# EAGLE board EndStop (EAGLE 7.2.0)
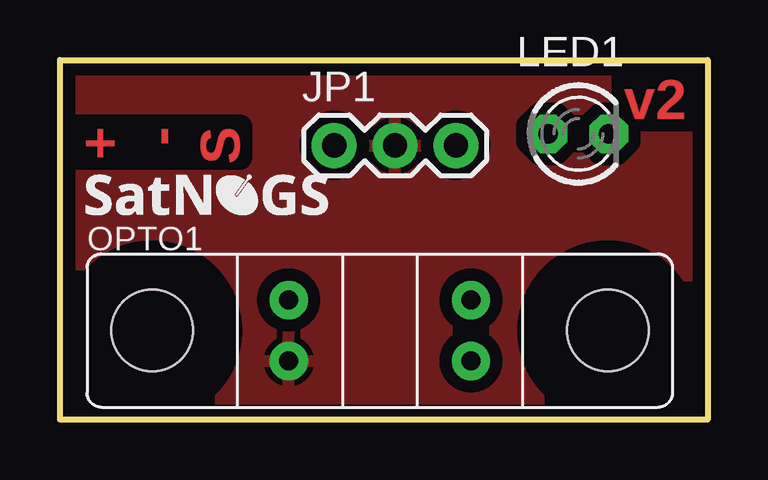
[diagram p0: board, top side]
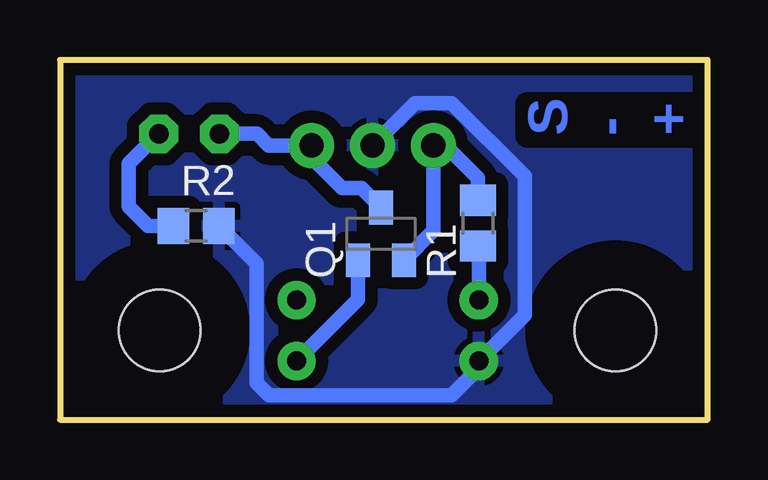
[diagram p1: board, bottom side, seen from below]

Size 27 x 15 mm. Coordinates in mm from the lower left corner, seen from the top.
Outline: 0,0 0,15 27,15 27,0 0,0
Copper layers (1*16): Top 0.035mm / dielectric 1.5mm / Bottom 0.035mm
Design rules "SeeedStudio_2layer_DRU_no_angle_20140221 *": minimum track width 16mil, minimum drill 0.8mm, track to track 6mil, track to pad 6mil, pad to pad 6mil, via to via 6mil, smd to smd 0mil, copper to edge 10mil, drill to drill 10mil, minimum pad ring 0.4mm, minimum via ring 0.4mm, stop-mask expansion 2mil, vias tented up to drill 100mil, thermal gap 10mil
Net classes: 0 default: width 0.508 mm, drill 0.813 mm, clearance 0.254 mm

## Footprints (pad centres in the part's own frame; a part is rotated, then mirrored left to right if it is on the bottom)
1X03 = drill 1.016 pad 1.88: 1 0,0; 2 2.54,0; 3 5.08,0
LED3MM = drill 0.813 octagon: A -1.27,0; K 1.27,0
TCST2013 = drill 0.8: LED_A -3.8,1.27; LED_K -3.8,-1.27; NPN_C 3.8,-1.27; NPN_E 3.8,1.27 | hole 3.4: -9.5,0; 9.5,0
SOT23-BEC = smd 1 x 1.4: B -0.95,-1.1; C 0,1.1; E 0.95,-1.1
R0805 = smd 1.3 x 1.5: 1 -0.95,0; 2 0.95,0

## Placement (x,y rotation side)
JP1  [1X03]  11.43,11.43 0 top
LED1  [LED3MM]  21.61,11.92 0 top
LOGO1  SATNOGS_LOGOSILK_XS  [LOGO_SILK_XS]  1.08,8.53 0 top
OPTO1  TCST2103  [TCST2013]  13.34,3.71 0 top
Q1  BC857ALT1SMD  [SOT23-BEC]  13.62,7.75 0 bottom
R1  180  [R0805]  9.57,8.19 90 bottom
R2  180  [R0805]  21.32,8.08 0 bottom

## Library data of the parts
JP1 = SparkFun-Connectors
LED1 = led
LOGO1 OPTO1 = satnogs
Q1 = transistor-pnp
R1 R2 = rcl

## Nets
GND: JP1.2 OPTO1.LED_K R2.2
N$2: OPTO1.LED_A R1.1
N$3: LED1.K R2.1
N$4: OPTO1.NPN_C Q1.B
SIGNAL: JP1.3 LED1.A Q1.C
VCC: JP1.1 Q1.E R1.2

## Tracks (layer width: path | path; a pad name or v marks a point on that pad's centre or on a via)
GND
  Bottom 0.61: JP1.2 12.19,13.21 10.67,13.21 7.62,10.16 7.62,4.36 OPTO1.LED_K 9.54,2.15 10.67,1.02 18.29,1.02 18.8,1.52 18.8,6.5 R2.2
  pour Bottom (isolate 0.508): 27,0 0,0 0,15 27,15
  pour Top (isolate 0.508, rank 2): 0,0 27.05,0 27.05,15.11 0,15.11
N$2
  Bottom 0.61: OPTO1.LED_A 9.54,7.2 R1.1
N$3
  Bottom 0.61: LED1.K 24.13,10.68 24.13,8.89 23.32,8.08 R2.1
N$4
  Bottom 0.61: OPTO1.NPN_C 14.56,5.01 Q1.B
SIGNAL
  Bottom 0.61: Q1.C 14.42,9.65 15.24,9.65 16.51,10.92 JP1.3 18.3,11.43 18.79,11.92 LED1.A
VCC
  Bottom 0.61: Q1.E 11.43,7.88 JP1.1 10.92,11.43 9.57,10.08 R1.2

## Text on the board
Top: v2 | + / - / S
Bottom: S / - / +
tValues: v2